# Altium PCB Driver Side PCB.PcbDoc
Units mm, origin at the board's own origin, x right, y up, seen from the top; angles counter-clockwise.
Board outline 99.7 x 17.4 mm, 4 copper layers (Top Layer, Ground, Power, Bottom Layer), stack 0.757 mm thick; 19 components, 18 nets, 71 pads, 70 vias.
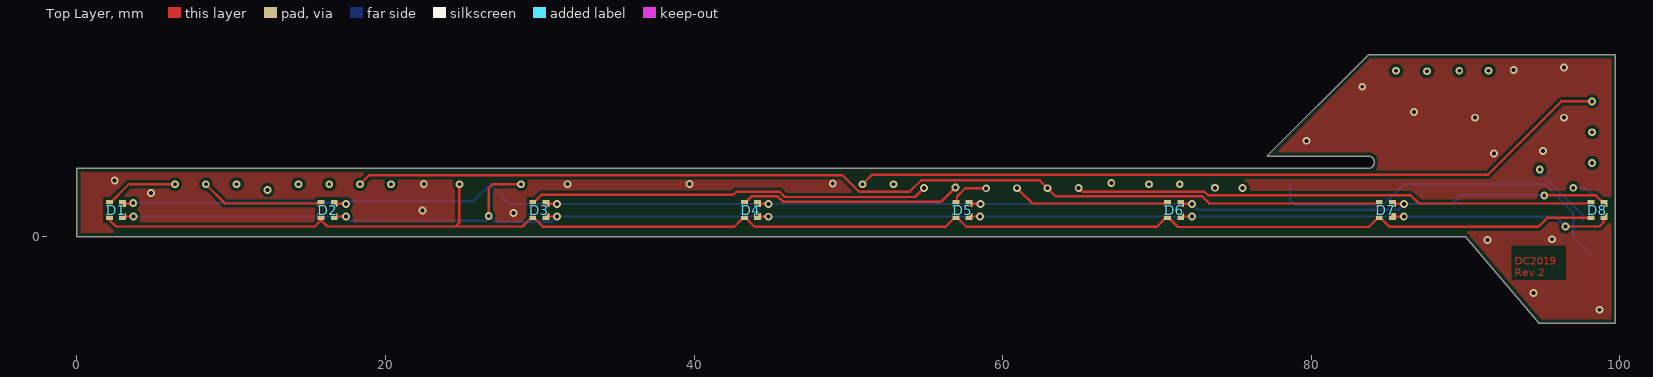
[diagram p0: Top Layer view]
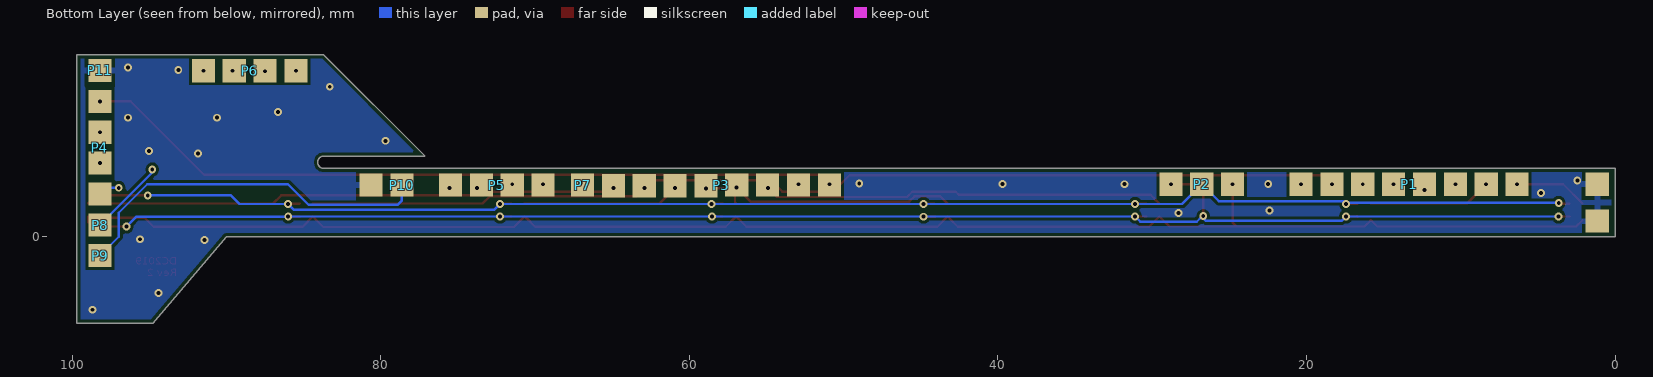
[diagram p1: Bottom Layer view, seen from below]
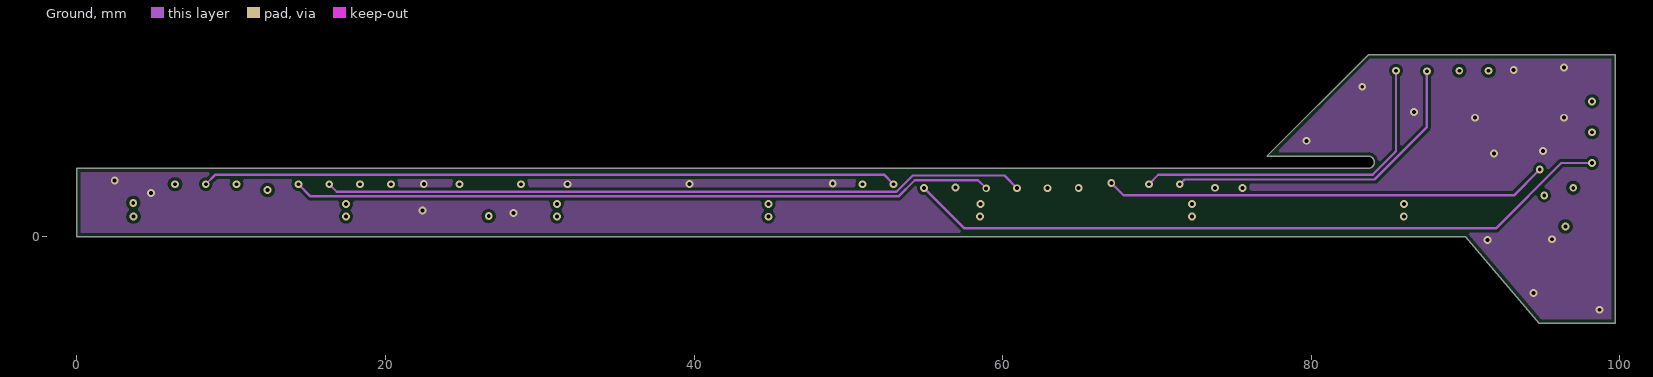
[diagram p2: Ground]
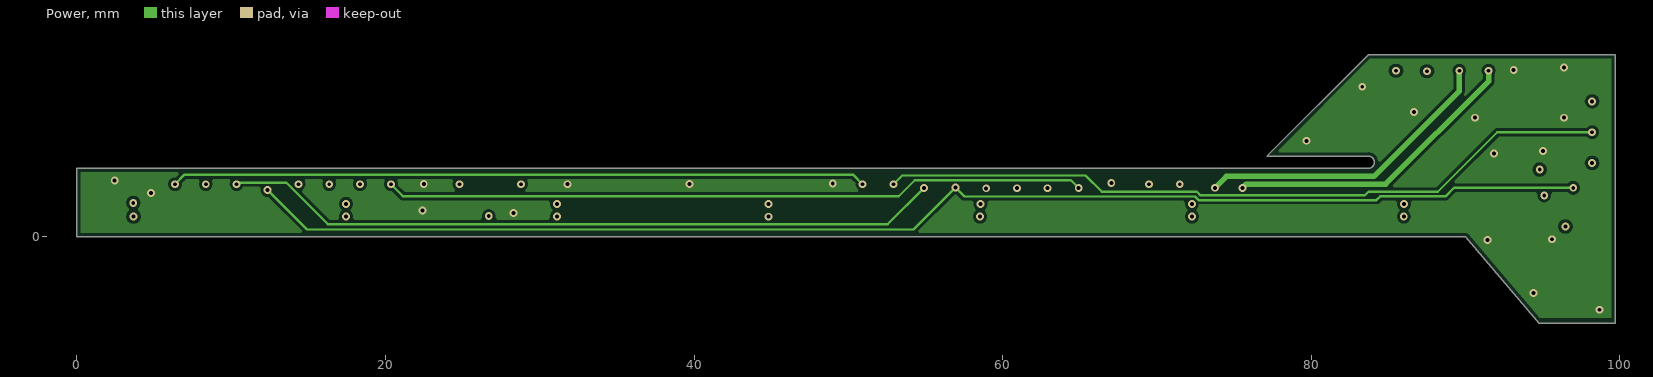
[diagram p3: Power]
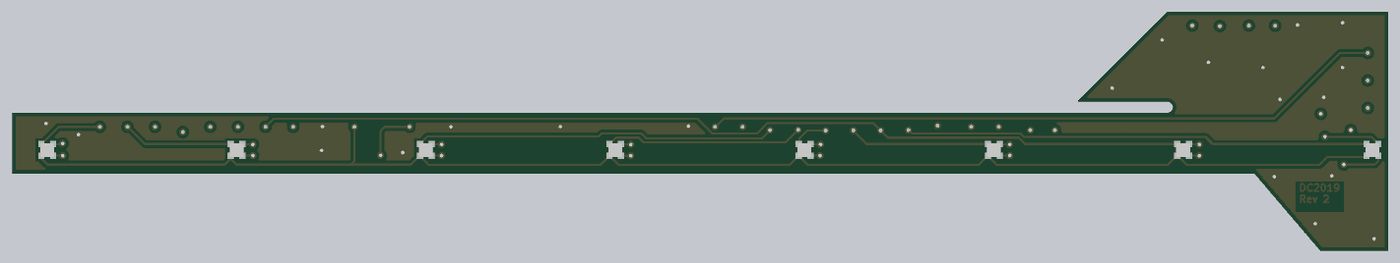
[diagram p4: 3D render of the assembled board from above, using the file's embedded part models]

## Layer stack, top to bottom
Top Solder: solder mask 0.0102, Solder Resist, Dk 3.5
Top Layer: signal copper 0.0356
Dielectric 2: prepreg 0.1422, PP-006, Dk 4.1
Ground: signal copper 0.0356
Dielectric 1: dielectric 0.3302, FR-4, Dk 4.8
Power: signal copper 0.0356
Dielectric 3: prepreg 0.1422, PP-006, Dk 4.1
Bottom Layer: signal copper 0.0356
Bottom Solder: solder mask 0.0102, Solder Resist, Dk 3.5

## Board outline
-0.001,0 -0.001,4.413 83.694,4.413 ccw(c83.694,4.813) 83.694,5.213 77.143,5.213 83.694,11.77 99.695,11.77 99.695,-5.633 94.788,-5.633 90.021,-0.029

## Design rules (kind name [scope] priority, off if disabled: settings)
BoardOutlineClearance [All] p1: gap=0.254 ignorepadtopadclearanceinfootprint=FALSE
Clearance [All] p1: gap=0.152 ignorepadtopadclearanceinfootprint=FALSE except(0: Arc-Hole Track-Hole SMDPad-Hole THPad-Hole Via-Hole Fill-Hole Poly-Hole Region-Hole Text-Hole; 0.203: Arc-Poly Track-Poly SMDPad-Poly THPad-Poly Via-Poly Fill-Poly Poly-Poly Poly-Text)
DiffPairsRouting [All] p1: maxlimit=0.254 minlimit=0.152 mostfreqgap=0.152 toplayer_minwidth=0.152 toplayer_maxwidth=0.381 toplayer_prefwidth=0.203 midlayer1_minwidth=0.152 midlayer1_maxwidth=0.381 midlayer1_prefwidth=0.203 midlayer2_minwidth=0.152 midlayer2_maxwidth=0.381 midlayer2_prefwidth=0.203 bottomlayer_minwidth=0.152 bottomlayer_maxwidth=0.381 bottomlayer_prefwidth=0.203 maxuncoupledlength=12.7
HoleSize [All] p1: absolutevalues=TRUE maxlimit=3.81 minlimit=0.254 maxpercent=80.000 minpercent=20.000
HoleToHoleClearance [All] p1: gap=0.457 allowstackedmicrovias=TRUE
MinimumAnnularRing [All] p1: minimumring=0.127
MinimumSolderMaskSliver [All] p1 off: minsoldermaskwidth=0.152
PlaneClearance [All] p1: clearance=0.305
PlaneConnect PlaneConnect_IsVia [IsVia] p1: planeconnectstyle=Direct reliefexpansion=0.508 reliefentries=4 reliefconductorwidth=0.254 reliefairgap=0.254
PlaneConnect [All] p2: planeconnectstyle=Relief reliefexpansion=0.508 reliefentries=4 reliefconductorwidth=0.381 reliefairgap=0.305
PolygonConnect PolygonConnect_IsVia [IsVia] p1: connectstyle=Direct reliefconductorwidth=0.254 reliefentries=4 polygonreliefangle="45 Angle" airgapwidth=0.254
PolygonConnect [All] p2: connectstyle=Relief reliefconductorwidth=0.381 reliefentries=4 polygonreliefangle="90 Angle" airgapwidth=0.254
RoutingVias [All] p1: holewidth=0.254 width=0.508 viastyle="Through Hole" minholewidth=0.254 minwidth=0.508 maxholewidth=0.508 maxwidth=1.016
SilkToSilkClearance [All] p1: silktosilkclearance=0.152
SilkToSolderMaskClearance [IsPad] p1: minsilkscreentomaskgap=0.152 clearancetoexposedcopper=TRUE
SolderMaskExpansion [Not IsVia] p1: expansion=0.102
Width [All] p1: maxlimit=1.27 minlimit=0.152 preferedwidth=0.152
22 further rules are at their usual default settings.

## Components (designator, comment, footprint, x,y, rotation, side; value= is the part's Value field where it differs from the comment)
D1 "0402 RGB LED" "0404 RGB LED" 2.538,1.712 r0 top
D2 "0402 RGB LED" "0404 RGB LED" 16.254,1.712 r0 top
D3 "0402 RGB LED" "0404 RGB LED" 29.97,1.712 r0 top
D4 "0402 RGB LED" "0404 RGB LED" 43.686,1.712 r0 top
D5 "0402 RGB LED" "0404 RGB LED" 57.402,1.712 r0 top
D6 "0402 RGB LED" "0404 RGB LED" 71.118,1.712 r0 top
D7 "0402 RGB LED" "0404 RGB LED" 84.834,1.712 r0 top
D8 "0402 RGB LED" "0404 RGB LED" 98.55,1.712 r0 top
P1 "8p SMD Pads" "8p SMD pad"#1 6.353,3.389 r90 bottom
P2 "3p SMD Pads" "3p SMD pad" 24.787,3.389 r90 bottom
P3 "8p SMD Pads" "8p SMD pad"#2 50.925,3.338 r90 bottom
P4 "4p SMD Pads" "4p SMD pad"#1 98.689,10.76 r0 bottom
P5 "4p SMD Pads" "4p SMD pad"#2 69.478,3.338 r90 bottom
P6 "4p SMD Pads" "4p SMD pad"#2 85.498,10.745 r90 bottom
P7 "1p SMD Pads" "1p SMD pad"#1 66.924,3.454 r180 bottom
P8 "1p SMD Pads" "1p SMD pad"#2 98.676,2.693 r180 bottom
P9 "1p SMD Pads" "1p SMD pad"#3 98.676,0.811 r180 bottom
P10 "1p SMD Pads" "1p SMD pad"#4 79.071,3.423 r90 bottom
P11 "1p SMD Pads" "1p SMD pad"#5 101.464,0.811 r180 bottom

## Footprints (in the part's own frame and the unit in brackets; to place one, negate y for a bottom-side part, rotate by r counter-clockwise, add the part's x,y. Pads: shape width x height; smd on the part's side, far side on the other; paste and mask are expansions set on the pad)
"1p SMD pad"#1 [mm]
  rect 1.5x1.5 smd: 1(-0.001,-0.115)
"1p SMD pad"#2 [mm]
  rect 1.5x1.5 smd: 1(0.48,-1.948)
"1p SMD pad"#3 [mm]
  rect 1.5x1.5 smd: 1(0.48,-2.046)
"1p SMD pad"#4 [mm]
  rect 1.5x1.5 smd: 1(-0.085,-0.439)
"1p SMD pad"#5 [mm]
  rect 1.5x1.5 smd: 1(3.255,9.949)
"3p SMD pad" [mm]
  rect 1.5x1.5 smd: 1(0,0) 2(0,4) 3(0,2)
"4p SMD pad"#1 [mm]
  rect 1.5x1.5 smd: 1(-0.48,2) 2(-0.48,4) 3(-0.48,6) 4(-0.48,8)
"4p SMD pad"#2 [mm]
  rect 1.5x1.5 smd: 1(0,0) 2(0,2) 3(0,4) 4(0,6)
"8p SMD pad"#1 [mm]
  rect 1.5x1.5 smd: 1(0,0) 2(0,2) 3(0,4) 4(0,6) 5(0,8) 6(0,10) 7(0,12) 8(0,14)
"8p SMD pad"#2 [mm]
  rect 1.5x1.5 smd: 1(0,0) 2(0,2) 3(0,4) 4(0,6) 5(-0.05,8) 6(-0.05,10) 7(-0.05,12) 8(-0.05,14)
"0404 RGB LED" [mm] "0404 RGB LED"
  rect 0.45x0.45 smd: 1(-0.425,0.425) 2(0.425,0.425) 3(0.425,-0.425) 4(-0.425,-0.425)
  body extent -0.5,-0.5 0.5,0.5, height 0.52

## Part data
P2: library part "3p SMD"
P4 P5 P6: library part "4p SMD"
P7 P8 P9 P10 P11: library part "1p SMD"

## Free pads (board coordinates)
  rect 1.5x1.5 smd far side: 1(1.154,1.006) 1(1.154,3.389) 2(80.632,3.339)

## Via types
v1: diameter 0.508, hole 0.254, Top Layer to Bottom Layer, tented both sides, 70 vias

## Nets (pads, with @x,y where several pads share a name; then routed paths per layer and width w, separated by ;. In a path a pad name is that pad's centre, name@x,y a point inside that pad or via, vN(x,y) a via of type N, cw(c..) or ccw(c..) an arc to the next point about the centre after c; other vN are vias at no path point)
BLUE1: D1.4 D2.4 D3.4 D4.4 D5.4 D6.4 D7.4 D8.4 P2.1 | length 101.5
  Top Layer w0.152: 2.113,1.059 2.524,0.647 15.417,0.647 15.829,1.059 16.24,0.647 24.519,0.647 24.787,0.916 v1(24.787,3.389) ; 24.544,0.647 28.881,0.647 D3.4@29.418,1.185 ; D3.4 30.199,0.633 42.601,0.633 D4.4@43.144,1.176 ; D4.4 43.92,0.628 56.301,0.628 D5.4@56.854,1.181 ; D5.4 57.635,0.629 70,0.629 D6.4@70.561,1.19 ; D6.4 71.361,0.619 83.73,0.619 D7.4@84.289,1.178 ; D7.4 85.073,0.623 94.719,0.623 95.301,1.205 98.042,1.205 D8.4
BLUE5: P7.1 P8.1 | length 33.4
  Ground w0.152: v1(67.042,3.472) 67.848,2.665 93.138,2.665 v1(94.809,4.336)
  Bottom Layer w0.152: P7.1@66.925,3.389 66.959,3.389 v1(67.042,3.472) ; v1(94.809,4.336) 94.809,4.147 97.58,1.376 P8.1@97.58,1.031
Col1: D1.1 P1.1 P3.1 P4.1 | length 99.4
  Top Layer w0.152: D1.1 3.364,3.389 v1(6.353,3.389) ; v1(50.925,3.389) 51.535,3.999 91.45,3.999 96.211,8.76 v1(98.209,8.76)
  Power w0.152: v1(6.353,3.389) 6.975,4.011 50.302,4.011 v1(50.925,3.389)
Col2: D2.1 P1.2 P3.2 P4.2 | length 100.8
  Top Layer w0.152: v1(8.353,3.389) 9.604,2.137 D2.1
  Ground w0.152: v1(8.353,3.389) 8.975,4.011 52.302,4.011 v1(52.925,3.389)
  Power w0.152: v1(52.925,3.389) 53.492,3.957 65.371,3.957 66.433,2.896 72.591,2.896 72.822,2.665 83.474,2.665 83.716,2.907 88.207,2.907 92.06,6.76 v1(98.209,6.76)
Col3: D3.1 P1.3 P3.3 P4.3 | length 118.9
  Top Layer w0.152: D3.1 29.877,2.47 ; 29.874,2.473 30.1,2.699 42.521,2.699 42.729,2.906 45.555,2.906 45.897,2.564 54.316,2.564 v1(54.9,3.148)
  Ground w0.152: v1(54.9,3.148) 57.502,0.545 91.996,0.545 ; 92.009,0.56 96.209,4.76 v1(98.209,4.76)
  Power w0.152: v1(10.353,3.389) 10.459,3.495 13.564,3.495 16.257,0.802 52.554,0.802 v1(54.9,3.148)
Col4: D4.1 P1.4 P3.4 P4.4 | length 103.2
  Top Layer w0.152: D4.1 43.725,2.601 45.415,2.601 45.757,2.26 56.029,2.26 v1(56.939,3.169)
  Power w0.152: v1(12.36,3.013) 14.915,0.458 54.228,0.458 v1(56.939,3.169) 57.518,2.591 72.465,2.591 72.696,2.36 84.231,2.36 84.473,2.602 88.71,2.602 89.264,3.155 v1(96.981,3.155)
  Bottom Layer w0.152: v1(96.981,3.155) 97.786,3.155 P4.4@98.196,2.745
Col5: D5.1 P1.5 P3.5 | length 48.2
  Top Layer w0.152: D5.1 57.043,2.204 57.043,2.591 57.576,3.124 v1(58.934,3.124)
  Ground w0.152: v1(14.353,3.389) 15.14,2.601 53.251,2.601 54.301,3.652 58.406,3.652 v1(58.934,3.124)
Col6: D6.1 P1.6 P3.6 | length 55.7
  Top Layer w0.152: v1(60.939,3.131) 61.932,2.137 D6.1
  Ground w0.152: v1(16.353,3.389) 16.835,2.906 53.124,2.906 54.175,3.957 60.113,3.957 v1(60.939,3.131)
Col7: D7.1 P1.7 P3.7 | length 67.7
  Top Layer w0.152: v1(18.353,3.389) 18.939,3.975 49.622,3.975 50.694,2.903 53.973,2.903 54.722,3.652 62.395,3.652 v1(62.916,3.131) 63.445,2.602 72.935,2.602 73.399,2.137 D7.1
Col8: D8.1 P1.8 P3.8 | length 79.2
  Top Layer w0.152: v1(64.928,3.151) 65.172,2.907 73.082,2.907 73.324,2.665 86.449,2.665 86.977,2.137 D8.1
  Power w0.152: v1(20.353,3.389) 21.129,2.612 53.266,2.612 54.306,3.652 64.427,3.652 v1(64.928,3.151)
GREEN1: D1.3 D2.3 D3.3 D4.3 D5.3 D6.3 D7.3 D8.3 P2.2 | length 106
  Top Layer w0.152: D1.3@2.945,1.296 D1.3@3.174,1.296 ; D1.3@3.183,1.295 v1(3.663,1.295) ; D2.3 16.705,1.314 16.723,1.295 16.759,1.331 16.794,1.295 v1(17.441,1.295) ; v1(26.692,1.319) 26.692,3.124 26.956,3.389 v1(28.787,3.389) ; D3.3@30.395,1.295 v1(31.106,1.295) ; D4.3@44.043,1.285 v1(44.814,1.285) ; D5.3@57.827,1.298 v1(58.53,1.298) ; D6.3@71.543,1.298 v1(72.273,1.298) ; D7.3@85.259,1.291 v1(86.001,1.291) ; v1(96.475,0.647) 98.676,0.647 98.964,0.936 98.964,1.277 D8.3
  Bottom Layer w0.152: v1(3.663,1.295) v1(17.441,1.295) 17.723,1.014 26.504,1.014 v1@26.781,1.291 ; v1(26.692,1.319) 26.753,1.319 v1@26.781,1.291 ; v1@26.827,1.283 26.819,1.291 v1@26.781,1.291 ; v1@31.244,1.295 v1@44.864,1.295 ; v1@31.244,1.317 31.128,1.317 v1(31.106,1.295) 30.766,0.955 27.117,0.955 v1@26.781,1.291 ; v1(44.814,1.285) 58.279,1.313 58.294,1.298 v1(58.53,1.298) v1(72.273,1.298) 72.276,1.294 85.998,1.294 v1(86.001,1.291) 95.831,1.291 v1(96.475,0.647)
Ground: P11.1 pad.1 pad.2
  other v1: 98.674,-4.748 94.405,-3.65 91.433,-0.233 95.602,-0.18 28.29,1.528 22.407,1.68 4.799,2.831 31.786,3.39 39.712,3.405 22.484,3.408 48.988,3.443 2.447,3.631 91.851,5.379 95.017,5.539 79.689,6.204 90.621,7.7 96.38,7.7 86.665,8.079 83.307,9.708 93.121,10.792 96.38,10.959
RED1: D1.2 D2.2 D3.2 D4.2 D5.2 D6.2 D7.2 D8.2 P2.3 | length 102.4
  Top Layer w0.152: D1.2 2.976,2.124 3.598,2.124 v1(3.653,2.179) ; D2.2 16.694,2.122 17.426,2.122 v1(17.441,2.106) ; D3.2 30.408,2.124 31.092,2.124 v1(31.105,2.11) ; D4.2 44.126,2.122 44.807,2.122 v1(44.823,2.106) ; D5.2 57.841,2.123 58.551,2.123 v1(58.566,2.108) ; D6.2 71.557,2.123 72.251,2.123 v1(72.265,2.108) ; D7.2 85.273,2.123 85.995,2.123 v1(86.01,2.108) ; v1(95.102,2.668) 98.444,2.668 D8.2
  Ground w0.152: v1@58.551,2.123 v1(58.566,2.108)
  Bottom Layer w0.152: v1(3.653,2.179) 17.369,2.179 v1(17.441,2.106) 17.617,2.281 25.679,2.281 P2.3 28.066,2.11 v1(31.105,2.11) 44.819,2.11 v1(44.823,2.106) 58.534,2.106 58.536,2.108 v1(58.566,2.108) v1@72.265,2.108 ; v1(72.265,2.108) 72.628,1.745 85.648,1.745 v1(86.01,2.108) 89.156,2.108 89.716,2.668 v1(95.102,2.668)
Switch: P9.1 P10.1 | length 24.1
  Bottom Layer w0.152: P10.1@78.632,3.39 78.632,2.333 78.915,2.05 84.671,2.05 86.01,3.389 95.136,3.389 96.981,1.543 96.981,-0.02 P9.1
UI_ENC_SIGA: P5.2 P6.2 | length 21.2
  Ground w0.152: v1(71.478,3.389) 71.781,3.692 84.1,3.692 87.498,7.09 v1(87.498,10.712)
  Bottom Layer w0.152: v1(87.498,10.712) P6.2
UI_ENC_SIGB: P5.1 P6.1 | length 22.3
  Ground w0.152: v1(69.478,3.389) 70.088,3.999 75.926,3.999 75.931,4.004 83.981,4.004 85.498,5.521 v1(85.498,10.745)
  Bottom Layer w0.152: P6.1@85.334,10.745 v1(85.498,10.745)
VBAT: P5.4 P6.4 | length 19.5
  Power w0.356: v1(75.542,3.148) 75.783,3.389 84.828,3.389 91.498,10.06 v1(91.498,10.745)
VUSB: P5.3 P6.3 | length 20.2
  Power w0.356: v1(73.762,3.155) 74.504,3.897 84.066,3.897 89.597,9.429 v1(89.597,10.745)
  Bottom Layer w0.152: P5.3@73.478,3.389 73.528,3.389 v1(73.762,3.155) ; P6.3 v1(89.597,10.745)

## Polygon pours and split planes (outlines as drawn)
Ground on Power "Power-Ground" (solid, remove dead copper, pour order 4): 100.068,-5.266 100.068,13.438 0.067,13.438 0.067,-5.266
Ground on Bottom Layer "Bottom Layer-Ground" (solid, remove dead copper, pour order 2): 99.994,-6.132 99.994,12.572 -0.007,12.572 -0.007,-6.132
Ground on Top Layer "Top Layer-Ground" (solid, remove dead copper, pour order 10): 100.084,-6.082 100.084,12.623 0.083,12.623 0.083,-6.082
Ground on Ground "Ground-Ground" (solid, remove dead copper, pour order 6): 100.028,-6.025 100.028,12.679 0.027,12.679 0.027,-6.025

## Other copper
Top Layer:
  text "DC2019 / Rev 2" at 93.194,-2.591 h0.51

## Silkscreen, mask and mechanical layers (free items; w line width, h text height)
Mechanical 2:
  the board outline again, w0.013